# Altium PCB NIR-Spec-Analog.PcbDoc
Units mm, origin at the board's own origin, x right, y up, seen from the top; angles counter-clockwise.
Board outline 22.5 x 15 mm, 2 copper layers (Component Side, Bottom Layer), stack 1.595 mm thick; 29 components, 17 nets, 66 pads, 13 vias.
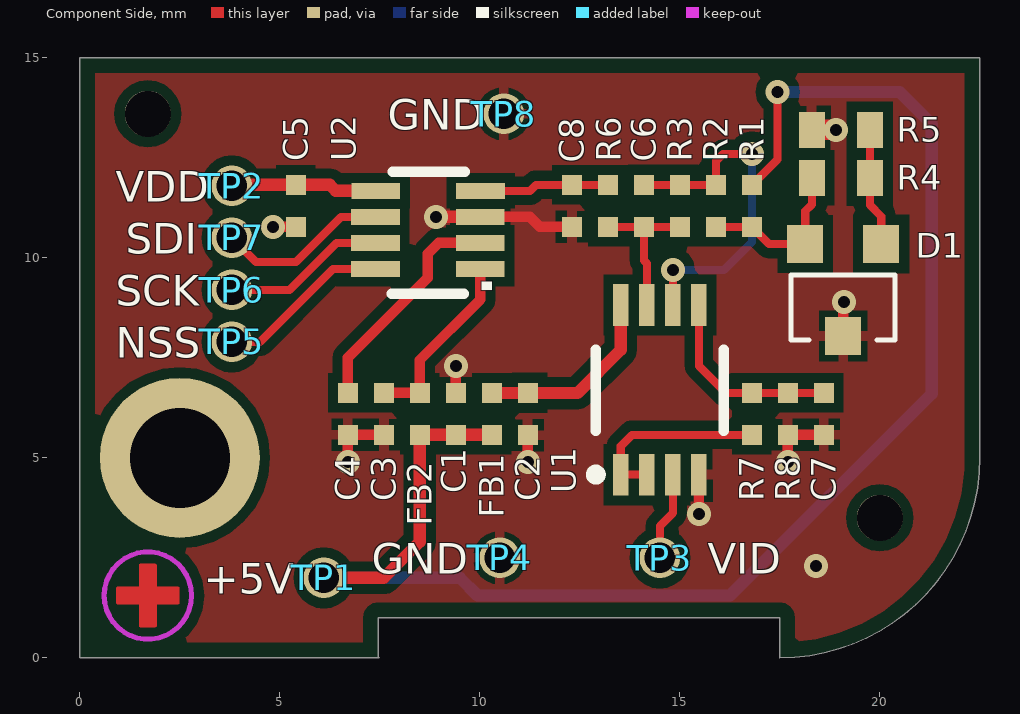
[diagram p0: Component Side view]
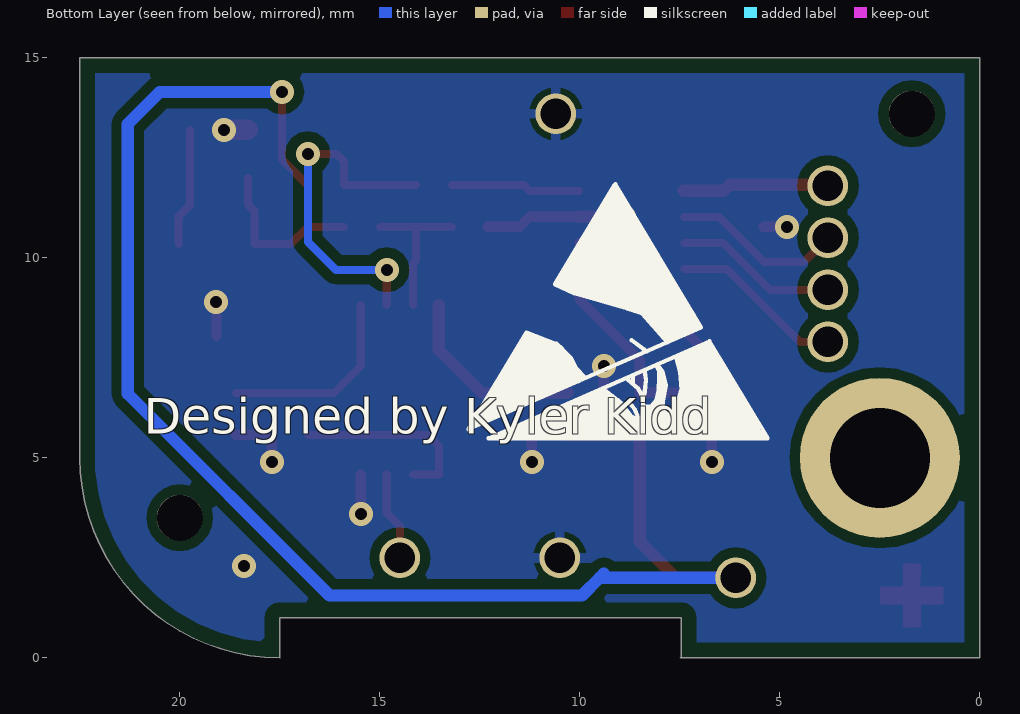
[diagram p1: Bottom Layer view, seen from below]
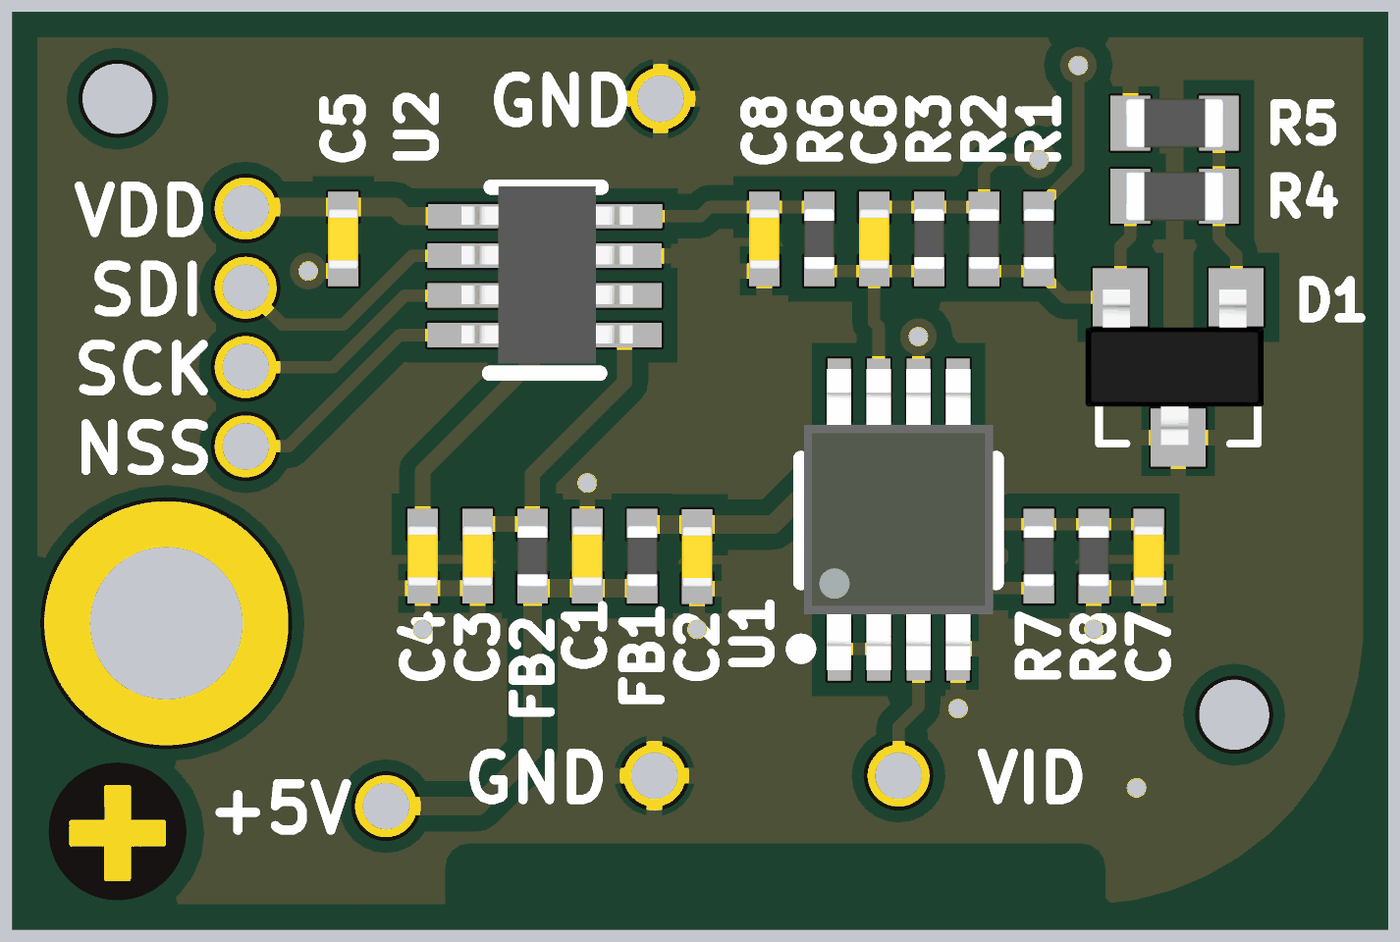
[diagram p2: 3D render of the assembled board from above, using the file's embedded part models]

## Layer stack, top to bottom
Top Solder: solder mask 0.0102, Solder Resist, Dk 3.5
Component Side: signal copper 0.0356
Dielectric 1: core 1.524, FR-4, Dk 4.2
Bottom Layer: signal copper 0.0356
Solder Side: solder mask 0.0102, Solder Resist, Dk 3.5

## Board outline
0,0 0,15 22.5,15 22.5,5 cw(c17.5,5) 17.5,0 17.5,1 7.462,1 7.462,0 7.484,0

## Design rules (kind name [scope] priority, off if disabled: settings)
BoardOutlineClearance [All] p1: gap=0.381 ignorepadtopadclearanceinfootprint=FALSE
Clearance "Clearance Polygons" [InPolygon] p1: gap=0.254 ignorepadtopadclearanceinfootprint=FALSE except(0: Arc-Hole Track-Hole SMDPad-Hole THPad-Hole Via-Hole Fill-Hole Poly-Hole Region-Hole Text-Hole)
Clearance [All] p2: gap=0.127 ignorepadtopadclearanceinfootprint=FALSE except(0: Arc-Hole Track-Hole SMDPad-Hole THPad-Hole Via-Hole Fill-Hole Poly-Hole Region-Hole Text-Hole)
ComponentClearance "HM-TRP & UFL" [InComponent('X1') vs InComponent('U1')] p1: gap=0 collisioncheckmode=3 verticalgap=0 showdistances=FALSE
ComponentClearance [All] p2: gap=0.025 collisioncheckmode=3 verticalgap=0.025 showdistances=FALSE
DiffPairsRouting [All] p1: maxlimit=10 minlimit=0.127 mostfreqgap=0.203 toplayer_minwidth=0.127 toplayer_maxwidth=0.381 toplayer_prefwidth=0.203 bottomlayer_minwidth=0.127 bottomlayer_maxwidth=0.381 bottomlayer_prefwidth=0.203 maxuncoupledlength=12.7
HoleSize [All] p1: absolutevalues=TRUE maxlimit=6.731 minlimit=0.254 maxpercent=80.000 minpercent=20.000
HoleToHoleClearance [All] p1: gap=0.254 allowstackedmicrovias=FALSE
MinimumAnnularRing [All] p1: minimumring=0.102
MinimumSolderMaskSliver [All] p1: minsoldermaskwidth=0
PlaneClearance [All] p1: clearance=0.254
PlaneConnect [All] p1: planeconnectstyle=Relief reliefexpansion=0.102 reliefentries=4 reliefconductorwidth=0.152 reliefairgap=0.152
PolygonConnect "Via connect style" [isVia] p1: connectstyle=Direct reliefconductorwidth=0.254 reliefentries=4 polygonreliefangle="90 Angle" airgapwidth=0.254
PolygonConnect [All] p2: connectstyle=Relief reliefconductorwidth=0.254 reliefentries=4 polygonreliefangle="90 Angle" airgapwidth=0.152
RoutingCorners [All] p1: cornerstyle=45-Degree minsetback=1.25 maxsetback=1.25
RoutingVias [All] p1: holewidth=0.305 width=0.559 viastyle="Through Hole" minholewidth=0.254 minwidth=0.457 maxholewidth=2.54 maxwidth=2.896
SilkToSilkClearance [All] p1: silktosilkclearance=0
SilkToSolderMaskClearance [IsPad] p1: minsilkscreentomaskgap=0.025 clearancetoexposedcopper=TRUE
SolderMaskExpansion [All] p1: expansion=0.064
Width GND [InNet('GND')] p1: maxlimit=0.762 minlimit=0.254 preferedwidth=0.508
Width Power [InNetClass('Power')] p2: maxlimit=1.016 minlimit=0.508 preferedwidth=0.762
Width 3V3 [InNetClass('3V3')] p3: maxlimit=0.762 minlimit=0.254 preferedwidth=0.508
Width [All] p4: maxlimit=10.16 minlimit=0.152 preferedwidth=0.203
20 further rules are at their usual default settings.

## Classes and differential pairs
component class "Test Points": TP1

## Components (designator, comment, footprint, x,y, rotation, side; value= is the part's Value field where it differs from the comment)
C1 "4.7uF" 0402 9.4,6.1 r270 top
C2 "0.1uF" 0402 11.2,6.092 r90 top
C3 "4.7uF" 0402 7.6,6.1 r90 top
C4 "4.7uF" 0402 6.7,6.1 r90 top
C5 "4.7uF" 0402 5.4,11.3 r90 top
C6 "22pF" 0402 14.1,11.3 r90 top
C7 "22pF" 0402 18.6,6.1 r270 top
C8 "470pF" 0402 12.3,11.3 r90 top
D1 "TLV431AQFTA" SOT-23-3 20.8,11 r180 top
FB1 "Ferrite_Bead" 0402 10.3,6.1 r90 top
FB2 "Ferrite_Bead" 0402 8.5,6.1 r90 top
R1 "10k" 0402 16.8,11.3 r270 top
R2 "1.0k" 0402 15.9,11.3 r90 top
R3 "1.2k" 0402 15,11.3 r270 top
R4 "0" 0603 19.025,12 r0 top
R5 "DNP" 0603 19.025,13.2 r180 top
R6 "51" 0402 13.2,11.3 r90 top
R7 "1.0k" 0402 16.8,6.1 r90 top
R8 "1.2k" 0402 17.7,6.1 r90 top
TP1 "TEST POINT" "30x40 TP"#1 6.1,2 r90 top
TP2 "TEST POINT" "30x40 TP"#2 4.3,11.8 r90 top
TP3 "TEST POINT" "30x40 TP"#1 14.5,2.5 r90 top
TP4 "TEST POINT" "30x40 TP"#1 10.5,2.5 r90 top
TP5 "TEST POINT" "30x40 TP"#3 3.8,7.8 r90 top
TP6 "TEST POINT" "30x40 TP"#1 3.8,9.2 r90 top
TP7 "TEST POINT" "30x40 TP"#1 3.8,10.5 r90 top
TP8 "TEST POINT" "30x40 TP"#4 10.6,13.581 r90 top
U1 "AD8072" MSOP-8 14.5,6.7 r0 top
U2 "LTC2312-12" TSOT-23-8 8.7,10.7 r90 top

## Footprints (in the part's own frame and the unit in brackets; to place one, negate y for a bottom-side part, rotate by r counter-clockwise, add the part's x,y. Pads: shape width x height; smd on the part's side, far side on the other; paste and mask are expansions set on the pad)
"30x40 TP"#1 [mil]
  round 40 hole 30: 1(0,0)
"30x40 TP"#2 [mil]
  round 40 hole 30: 1(0,19.69)
"30x40 TP"#3 [mil]
  round 40 hole 30: 1(3.94,0)
"30x40 TP"#4 [mil]
  round 40 hole 30: 1(0.75,0)
0402 [mm] "Chip Capacitor; Body 1.0 x 0.5 mm (LxW typ)"
  rect 0.5x0.5 smd mask+0.038: 1(-0.525,0) 2(0.525,0)
  body extent -0.5,-0.25 0.5,0.25, height 0.6
0603 [mm] "Chip Resistor; Body 1.6 x 0.9 mm (LxW typ)"
  rect 0.65x0.9 smd mask+0.038: 1(-0.725,0) 2(0.725,0)
  body extent -0.8,-0.4 0.8,0.4, height 0.5
MSOP-8 [mm]
  rect 0.38x1.04 smd mask+0.038: 1(-0.975,-2.12) 2(-0.325,-2.12) 3(0.325,-2.12) 4(0.975,-2.12) 5(0.975,2.12) 6(0.325,2.12) 7(-0.325,2.12) 8(-0.975,2.12)
  silkscreen extent -1.72,-2.24 1.6,1, body extent -1.55,-2.47 1.55,2.47, height 1.09
SOT-23-3 [mm]
  rect 0.9x0.95 smd mask+0.038: 1(0.766,0.655) 2(2.666,0.655) 3(1.716,2.955)
  silkscreen extent 0.42,1.43 3.02,3.06, body extent 0.31,0.53 3.24,3.07, height 0.98
TSOT-23-8 [mm] "8-LEAD PLASTIC TSOT-23"
  rect 0.4x1.22 smd mask+0.038: 1(-0.975,-1.31) 2(-0.325,-1.31) 3(0.325,-1.31) 4(0.975,-1.32) 5(0.975,1.3) 6(0.325,1.31) 7(-0.325,1.31) 8(-0.975,1.31)
  silkscreen extent -1.6,-0.93 1.45,0.9, body extent -1.44,-1.44 1.46,1.36, height 1

## Part data
C1 C3 C4 C5: library part CAP, "CAP CER 10UF 10V X6S 0603", Manufacturer="Murata Electronics", Part Number=GRM188C81A106MA73D, Voltage=10V
C2: library part CAP, "CAP CER 0.1UF 50V X7R 0603", Manufacturer=KEMET, Part Number=C0603C104K5RAC3121, Voltage=50V
C6 C7: library part CAP, "CAP CER 22PF NP0 50V 0603", Manufacturer=Vishay, Part Number=VJ0603A220KXAAC, Voltage=50V
C8: library part CAP, "CAP CER 470PF NP0 100V 0603", Manufacturer=Vishay, Part Number=VJ0603A220KXAAC, Voltage=100V
D1: "Shunt Voltage Reference IC Adjustable 1.24V 18 VV ±1% 15 mA SOT-23-3", Manufacturer="Diodes Incorporated", Part Number=TLV431AQFTA
FB1 FB2: "Ferrite Beads 1000 OHM 25%", Manufacturer="Murata Electronics", Part Number=BLM18AG102SH1D, Rated Current="450mA Max", Impedance="1kO at 100MHz"
R1 R4 R5: library part RES, "RESISTOR"
R2 R7: library part RES, Manufacturer="TE Connectivity", Part Number=CPF-A-0603B1K0E
R3 R8: library part RES, "Thin Film Resistors - SMD 0603 249ohms 25ppm 0.5%", Manufacturer=Panasonic, Part Number=ERA-3AED2490V
R6: library part RES, "Thin Film Resistors - SMD .1W 51ohm 1% 0603", Manufacturer=Vishay, Part Number=MCT06030C5109FP500
U1: "IC OPAMP VIDEO DUAL 8MSOP", Manufacturer="Analog Devices Inc.", Part Number=AD8072ARMZ
U2: library part LTC2314xTS8-14#TRMPBF, "IC ADC 12BIT SAR TSOT23-8", Manufacturer="Linear Technology", Part Number=LTC2314xTS8-14#TRMPBF
TP1: ClassName="Test Points"

## Free pads (board coordinates)
  round 1.152 hole 1.152 unplated: TH(1.7,13.6) TH(20,3.5)
  round 4 hole 2.5: ""(2.5,5)

## Via types
v1: diameter 0.6, hole 0.3, Component Side to Bottom Layer, tented both sides, 13 vias

## Nets (pads, with @x,y where several pads share a name; then routed paths per layer and width w, separated by ;. In a path a pad name is that pad's centre, name@x,y a point inside that pad or via, vN(x,y) a via of type N, cw(c..) or ccw(c..) an arc to the next point about the centre after c; other vN are vias at no path point)
+3.3V: C5.2 TP2.1 U2.5 | length 3.7
  Component Side w0.305: TP2.1 3.825,11.825 5.6,11.825 6.25,11.825 6.4,11.675 U2.5
+5.0V: C1.2 FB1.1 FB2.1 R1.1 TP1.1 | length 38.4
  Component Side w0.203: R1.1 16.808,11.825 17.446,12.463 v1(17.446,14.146)
  Component Side w0.305: TP1.1 7.6,2 8.5,2.9 FB2.1 C1.2 FB1.1
  Bottom Layer w0.305: TP1.1 9.5,2 ; 9.4,2.1 9.5,2 ; v1(17.446,14.146) 20.5,14.146 21.3,13.346 21.3,6.6 16.257,1.557 9.943,1.557 9.5,2
D_VID: TP3.1 U1.3 | length 2.2
  Component Side w0.203: TP3.1 14.5,3.3 14.825,3.625 U1.3
GND: C1.1 C2.1 C3.1 C4.1 C5.1 C7.2 C8.1 D1.3 R5.2 R8.1 TP4.1 TP8.1 U1.4 U2.3 | length 11
  Component Side w0.254: v1(4.825,10.775) C5.1 ; v1(6.7,4.9) C4.1 C3.1 ; C1.1 v1(9.4,7.3) ; U2.3 11.25,11.025 11.5,10.775 C8.1 ; v1(11.2,4.9) C2.1 ; v1(15.475,3.6) U1.4 ; v1(17.7,4.9) R8.1 C7.2 ; D1.3 19.084,8.884 v1(19.1,8.9)
  Component Side w0.305: v1(8.9,11.025) U2.3
  Component Side w0.508: R5.2 v1(18.9,13.2)
  other v1: 18.4,2.3
MCU_NSS: TP5.1 U2.8 | length 4.3
  Component Side w0.203: TP5.1 4.5,7.9 6.325,9.725 U2.8
MCU_SCK: TP6.1 U2.7 | length 4.1
  Component Side w0.203: TP6.1 5.24,9.2 6.415,10.375 U2.7
MCU_SDI: TP7.1 U2.6 | length 4.3
  Component Side w0.203: TP7.1 4.4,9.9 5.4,9.9 6.525,11.025 U2.6
NetC2_2: C2.2 FB1.2 U1.8 | length 4.8
  Component Side w0.305: FB1.2 10.308,6.617 C2.2 12.442,6.617 13.525,7.7 U1.8
NetC3_2: C3.2 FB2.2 U2.1 | length 4.6
  Component Side w0.254: C3.2 FB2.2 8.5,7.445 10.01,8.955 U2.1
NetC4_2: C4.2 U2.2 | length 5.7
  Component Side w0.254: C4.2 6.7,7.5 8.7,9.5 8.7,10.1 8.975,10.375 U2.2
NetC6_1: C6.1 R3.2 R6.1 U1.7 | length 3.8
  Component Side w0.203: R6.1 C6.1 ; U1.7 14.175,9.86 14.1,9.935 C6.1 ; R3.2 C6.1
NetC6_2: C6.2 R2.2 R3.1 U1.6 | length 8.7
  Component Side w0.203: C6.2 R3.1 R2.2 15.9,12.419 16.081,12.6 v1(16.8,12.6) ; U1.6 v1(14.825,9.7)
  Bottom Layer w0.203: v1(14.825,9.7) 16.1,9.7 16.8,10.4 v1(16.8,12.6)
NetC7_1: C7.1 R7.2 R8.2 U1.5 | length 4.9
  Component Side w0.203: U1.5 15.475,7.3 16.15,6.625 R7.2 R8.2 C7.1
NetC8_2: C8.2 R6.2 U2.4 | length 3.2
  Component Side w0.203: U2.4 11.25,11.675 11.4,11.825 C8.2 R6.2
NetD1_1: D1.1 R4.2 R5.1 | length 3
  Component Side w0.203: R5.1 R4.2 19.75,11.321 20.034,11.037 D1.1
NetD1_2: D1.2 R1.2 R2.1 R4.1 | length 4.1
  Component Side w0.203: R2.1 R1.2 17.23,10.345 D1.2 18.134,11.171 18.3,11.337 R4.1
NetR7_1: R7.1 U1.1 U1.2 | length 4.8
  Component Side w0.203: U1.2 U1.1 13.525,5.3 13.8,5.575 R7.1

## Polygon pours and split planes (outlines as drawn)
GND on Component Side "GND_L01_P051" (solid, remove dead copper, pour order 51): 0,0 0,15 22.5,15 22.5,5 cw(c17.5,5) 17.5,0 17.5,1 7.462,1 7.462,0 7.484,0
GND on Bottom Layer "GND_L02_P052" (solid, remove dead copper, pour order 52): 0,0 0,15 22.5,15 22.5,5 cw(c17.5,5) 17.5,0 17.5,1 7.462,1 7.462,0 7.484,0

## Keep-outs
Component Side:
  circle w0.127: c1.701,1.557 r1.092

## Other copper
Component Side:
  region: 1.911,2.338 1.919,2.319 1.919,1.775 2.463,1.775 2.482,1.766 2.49,1.747 2.49,1.366 2.482,1.347 2.463,1.339 1.919,1.339 1.919,0.795 1.911,0.775 1.891,0.767 1.51,0.767 1.491,0.775 1.483,0.795 1.483,1.339 0.939,1.339 0.919,1.347 0.911,1.366 0.911,1.747 0.919,1.766 0.939,1.775 1.486,1.775 1.483,2.318 1.483,2.319 1.487,2.328 1.491,2.338 1.5,2.342 1.51,2.346 1.891,2.346

## Silkscreen, mask and mechanical layers (free items; w line width, h text height)
Top Overlay:
  text "GND" at 7.7,13.2 h0.76
  text "VDD" at 0.9,11.4 h0.76
  text "SDI" at 1.154,10.1 h0.76
  text "SCK" at 0.9,8.8 h0.76
  text "NSS" at 0.9,7.5 h0.76
  text "GND" at 7.3,2.1 h0.76
  text "VID" at 15.7,2.1 h0.76
  text "+5V" at 3.1,1.6 h0.76
Bottom Overlay:
  drawing of 234 lines, arcs and shapes, not listed
  text "Designed by Kyler Kidd" at 20.9,5.3 h1.52
Top Solder:
  circle w0.254: c1.701,1.586 r1.001
  rectangle: 0.901,0.786 2.476,1.186
  rectangle: 0.926,2.011 2.476,2.386
  rectangle: 1.276,0.561 2.076,2.611
  rectangle: 0.751,1.161 2.626,2.036
  region: 1.906,2.367 1.914,2.348 1.914,1.804 2.458,1.804 2.478,1.796 2.486,1.776 2.486,1.395 2.478,1.376 2.458,1.368 1.914,1.368 1.914,0.824 1.906,0.804 1.887,0.796 1.506,0.796 1.487,0.804 1.478,0.824 1.478,1.368 0.934,1.368 0.915,1.376 0.907,1.395 0.907,1.776 0.915,1.796 0.934,1.804 1.482,1.804 1.478,2.347 1.478,2.348 1.482,2.357 1.486,2.367 1.487,2.367 1.496,2.371 1.506,2.375 1.887,2.375
  region: 1.911,2.338 1.919,2.319 1.919,1.775 2.463,1.775 2.482,1.766 2.49,1.747 2.49,1.366 2.482,1.347 2.463,1.339 1.919,1.339 1.919,0.795 1.911,0.775 1.891,0.767 1.51,0.767 1.491,0.775 1.483,0.795 1.483,1.339 0.939,1.339 0.919,1.347 0.911,1.366 0.911,1.747 0.919,1.766 0.939,1.775 1.486,1.775 1.483,2.318 1.483,2.319 1.487,2.328 1.491,2.338 1.5,2.342 1.51,2.346 1.891,2.346
Mechanical 1:
  lines w0.254: 0,0 7.462,0 7.462,1 17.5,1 17.5,0 ccw(c17.5,5) 22.5,5 22.5,15 0,15 0,0
ASSY_TOP:
  drawing of 322 lines, arcs and shapes, not listed
  text "SH" at 349.503,298.663 h2.54
  text "DWG NO" at 274.351,298.248 h2.54
  text ".DocNumber" at 291.002,295.408 h3.05
  text "2" at -247.993,294.92 h5.08
  text "4" at -31.92,294.92 h5.08
  text "8" at 392.438,294.92 h5.08
  text "1" at -355.721,294.76 h5.08
  text "3" at -139.999,294.76 h5.08
  text "5" at 76.079,294.76 h5.08
  text "6" at 184.026,294.76 h5.08
  text "1" at 354.502,294.392 h3.05
  text "REVISION HISTORY" at 300.654,288.013 h2.54
  text "REV" at 276.27,281.946 h2.54
  text "DESCRIPTION" at 321.99,281.946 h2.54
  text "DATE" at 380.41,281.946 h2.54
  text "APPROVED" at 410.89,281.946 h2.54
  text ".Hist1Rev" at 277.175,277.345 h2.54
  text ".Hist1Desc" at 288.97,276.866 h2.54
  text ".Hist1Date" at 372.79,276.866 h2.54
  text ".Hist1Appr" at 403.27,276.866 h2.54
  text "NOTES" at -368.89,275.59 h10.16
  text ".Hist2Rev" at 277.175,271.732 h2.54
  text ".Hist2Desc" at 288.97,271.252 h2.54
  text ".Hist2Date" at 372.79,271.252 h2.54
  text ".Hist2Appr" at 403.27,271.252 h2.54
  text "1. DIMENSIONING AND TOLERANCING PER ASME Y14.5M-1994" at -368.89,267.97 h5.08
  text ".Hist3Rev" at 277.175,266.144 h2.54
  text ".Hist3Desc" at 288.97,265.664 h2.54
  text ".Hist3Date" at 372.79,265.664 h2.54
  text ".Hist3Appr" at 403.27,265.664 h2.54
  text "2. INTERPRET PER ASME Y14.100M" at -368.89,260.35 h5.08
  text "3. ASSEMBLE PER IPC-A-610, CLASS 2" at -368.89,252.73 h5.08
  text "4. SOLDER PER J-STD-001, CLASS 2. USE LEAD-FREE SOLDER" at -368.89,245.11 h5.08
  text "5. ALL PARTS SHOWN MAY NOT BE INSTALLED. FOR SCHEMATIC, SEE SEPARATE PARTS LIST" at -368.89,237.49 h5.08
  text "A" at -397.79,231.255 h5.08
  text "A" at 440.497,231.255 h5.08
  text "6. DATA INCLUDED IN PARENTHESIS IS FOR REFERENCE ONLY" at -368.89,229.87 h5.08
  text "7. FOR COMPONENTS WITH REFERENCE DESIGNATORS, REFER TO PARTS LIST BY REFERENCE DESIGNATION" at -368.89,222.25 h5.08
  text "8. ELECTROSTATIC DISCHARGE CONTROL PROGRAM FOR PROTECTION OF ELECTRICAL AND ELECTRONIC" at -368.89,214.63 h5.08
  text "PARTS, ASSEMBLIES, AND EQUIPMENT SHALL BE PER IPC-610 OR BETTER" at -368.89,207.01 h5.08
  text "9. THE PCB MATERIAL MANUFACTURER'S RECOMMENDATIONS FOR PCB MATERIAL STORAGE, PRE-PROCESS" at -368.89,199.39 h5.08
  text "BAKEOUT, PROCESSING AND MATERIAL HANDLING SHALL BE STRICTLY FOLLOWED DURING ALL ASSEMBLY" at -363.81,191.77 h5.08
  text "PROCESSES. DEVIATION FROM THESE STANDARDS REQUIRES WRITTEN AUTHORIZATION FROM OCEAN OPTICS, INC" at -363.81,184.15 h5.08
  text "10. MARK LAST 3 DIGITS OF DRAWING NUMBER (-XXX) IN A CLEAR AND LEGIBLE MANNER USING POLYIMIDE BRADY LABEL" at -371.43,176.53 h5.08
  text "11. MARK DOCUMENT REVISION IN A CLEAR AND LEGIBLE MANNER USING POLYIMIDE BRADY LABEL" at -371.43,168.91 h5.08
  text "12. ALL PROCESSES AND PROCEDURES SHALL BE ROHS COMPLIANT" at -371.43,161.29 h5.08
  text "13. COMPLETED CIRCUIT CARD ASSEMBLIES SHALL BE PACKAGED INDIVIDUALLY" at -371.43,153.67 h5.08
  text "IN STATIC SHIELDING PACKAGING IN ACCORDANCE WITH ANSI/ESD-S-20.20" at -363.81,146.05 h5.08
  text "B" at -397.84,91.395 h5.08
  text "B" at 440.447,91.395 h5.08
  text "C" at -397.255,-48.078 h5.08
  text "C" at 441.031,-48.078 h5.08
  text "Dimensions in mm" at 326.5,-77 h6.35
  text "Scale  3:1" at 221.5,-97 h12.7
  text "SEE SEPARATE PARTS LIST." at 171.876,-166.872 h10.16
  text "DFTG" at 212.77,-175.791 h2.54
  text ".NameDftg" at 225.978,-175.791 h2.54
  text ".DateDftg" at 265.602,-175.791 h2.54
  text "UNLESS OTHERWISE SPECIFIED," at 157.906,-180.109 h2.03
  text "MATERIAL:" at 94.736,-180.334 h2.54
  text "ENG" at 212.77,-182.395 h2.54
  text ".NameEng" at 225.978,-182.395 h2.54
  text ".DateEng" at 265.602,-182.395 h2.54
  text "INCHES" at 193.974,-183.636 h2.03
  text "DIMENSIONS ARE IN" at 157.906,-183.665 h2.03
  text "D" at -397.508,-187.777 h5.08
  text "D" at 440.779,-187.777 h5.08
  text "MECH" at 212.77,-187.983 h2.54
  text "*" at 225.978,-188.491 h2.54
  text "*" at 265.602,-188.491 h2.54
  text "TITLE:" at 304.58,-190.523 h2.54
  text "TOLERANCES:" at 157.906,-191.539 h2.54
  text "SEE NOTES" at 96.565,-193.542 h2.54
  text "MFG" at 212.77,-194.587 h2.54
  text "*" at 225.978,-194.587 h2.54
  text "*" at 265.602,-195.095 h2.54
  text ".X +/- 0.1" at 158.922,-196.111 h2.54
  text ".XX +/- 0.01" at 158.922,-199.159 h2.54
  text ".TitleCCA" at 311.195,-199.511 h5.59
  text ".XXX +/- 0.001" at 158.922,-202.207 h2.54
  text ".Title0" at 315.5,-209 h5.59
  text "THIRD ANGLE PROJECTION" at 96.184,-213.761 h2.54
  text "ALL SHEETS ARE THE" at 162.478,-217.859 h2.54
  text ".Title1" at 308.02,-218.44 h5.59
  text "SAME REVISION STATUS" at 160.129,-222.431 h2.54
  text "SIZE" at 304.718,-225.575 h2.54
  text "DRAWING NUMBER" at 314.37,-225.575 h2.54
  text "REV" at 421.442,-227.125 h3.05
  text "D" at 304.76,-233.416 h5.08
  text ".DocNumber" at 314.37,-233.674 h6.6
  text ".Rev" at 421.05,-233.674 h5.08
  text "1" at 405.81,-238.754 h2.54
  text "2" at 421.05,-238.754 h2.54
  text "1:1" at 318.18,-239.008 h2.54
  text "SCALE" at 304.154,-239.183 h2.54
  text "SHEET   OF" at 390.061,-239.398 h2.54
  text "8" at 397.936,-249.93 h5.08
  text "1" at -355.555,-250.184 h5.08
  text "2" at -247.993,-251.178 h5.08
  text "4" at -31.92,-251.178 h5.08
  text "3" at -139.999,-251.338 h5.08
  text "5" at 76.079,-251.338 h5.08
  text "6" at 184.026,-251.338 h5.08
  text "7" at 292,-251.338 h5.08
Drill Drawing:
  lines w0.381: -328.718,-181.604 -328.718,-173.984 ; -310.993,-181.604 -310.993,-173.984 ; -276.815,-181.604 -276.815,-173.984 ; -263.966,-181.604 -263.966,-173.984 ; -342.71,-181.604 -244.184,-181.604 -244.184,-173.984 -342.71,-173.984 -342.71,-181.604 ; -342.71,-177.794 -244.184,-177.794 -342.71,-177.794
  text "Symbol" at -340.424,-176.651 h1.83
  text "Hit Count" at -327.575,-176.651 h1.83
  text "Finished Hole Size" at -309.85,-176.651 h1.83
  text "Plated" at -275.672,-176.651 h1.83
  text "Hole Type" at -262.823,-176.651 h1.83
ASSY_BOT:
  lines w0.198: -378.912,281.438 -219.197,281.438 ; -378.912,286.518 -219.197,286.518 ; -345.816,281.565 -345.811,292.103 ; -313.177,281.057 -313.177,292.106 ; -231.897,275.723 -231.897,292.106 ; -404.45,-253.797 -404.45,304.806 ; -404.45,-253.797 458.983,-253.797 ; -404.45,-253.797 458.983,-253.797 ; -404.45,-253.797 -404.45,304.806 ; -404.45,304.806 458.983,304.806 ; -404.45,304.806 458.983,304.806 ; 458.983,-253.797 458.983,304.806 ; 458.983,-253.797 458.983,304.806
  lines w0.599: -398.282,-107.947 -379.232,-107.947 ; -398.282,165.102 -379.232,165.102 ; -379.232,292.101 -379.232,-241.297 ; -379.232,-222.247 -249.184,-222.247 ; -364.221,-234.947 -364.221,-222.247 ; -334.782,-241.297 -334.782,-234.947 ; -296.682,-250.822 -296.682,-241.297 ; -249.185,-241.167 -249.185,-222.628 ; -219.319,275.088 -219.319,292.103 ; -188.733,-250.822 -188.733,-241.297 ; -188.733,292.101 -188.733,301.626 ; -80.783,-250.822 -80.783,-241.297 ; -80.783,292.101 -80.783,301.626 ; 135.117,-250.822 135.117,-241.297 ; 135.117,292.101 135.117,301.626 ; 243.067,-250.822 243.067,-241.297 ; 351.016,-250.822 351.016,-241.297 ; 351.016,292.101 351.016,301.626 ; 433.566,165.102 452.616,165.102 ; 433.566,292.103 -379.245,292.103 ; 434.201,-107.947 453.251,-107.947 ; -379.245,292.103 -379.245,271.626 -379.245,292.103 ; -379.232,-241.297 433.566,-241.297 ; -379.232,-241.297 433.566,-241.297 ; -379.232,-241.297 433.566,-241.297 ; -379.232,-241.297 433.566,-241.297 ; -379.232,-234.947 -249.184,-234.947 ; -379.232,-234.947 -249.184,-234.947 ; -379.232,-234.947 -249.184,-234.947 ; -379.232,-234.947 -249.184,-234.947 ; -306.842,292.101 -306.842,301.753 ; -306.842,292.101 -306.842,301.753 ; -306.842,292.101 -306.842,301.753 ; -306.842,292.101 -306.842,301.753 ; -306.842,292.101 -306.842,301.753 ; -306.842,292.101 -306.842,301.753 ; -306.842,292.101 -306.842,301.753 ; -306.842,292.101 -306.842,301.753 ; -306.842,301.753 -219.299,301.753 ; -306.842,301.753 -224.292,301.753 -306.842,301.753 ; -306.842,301.753 -219.299,301.753 ; -294.142,292.101 -294.142,301.753 ; -294.142,292.101 -294.142,301.753 ; -294.142,292.101 -294.142,301.753 ; -294.142,292.101 -294.142,301.753 ; -219.299,301.753 -219.299,292.101 -219.299,301.753 ; 243.067,292.101 243.067,301.626 ; 243.067,292.101 243.067,301.626 ; 243.067,292.101 243.067,301.626 ; 243.067,292.101 243.067,301.626 ; 433.566,-241.297 433.566,284.278 433.566,-241.297 ; 433.566,-241.297 433.566,292.101 ; 433.566,-241.297 433.566,292.101 ; 433.566,-241.297 433.566,292.101 ; -389.392,24.64 -389.392,26.164 -384.312,26.164 -384.312,27.942 -379.232,25.402 -384.312,22.862 -384.312,24.64 -389.392,24.64 ; 24.627,-246.377 27.167,-241.297 29.707,-246.377 27.929,-246.377 27.929,-251.457 26.405,-251.457 26.405,-246.377 24.627,-246.377 ; 24.627,297.181 27.167,292.101 29.707,297.181 27.929,297.181 27.929,302.26 26.405,302.26 26.405,297.181 24.627,297.181 ; 433.566,25.402 438.646,22.862 438.646,24.64 443.726,24.64 443.726,26.164 438.646,26.164 438.646,27.942 433.566,25.402
  text "SH" at -294.97,298.663 h2.54
  text "DWG NO" at -219.818,298.248 h2.54
  text ".DocNumber" at -236.469,295.408 h3.05
  text "8" at -337.905,294.92 h5.08
  text "4" at 86.453,294.92 h5.08
  text "2" at 302.526,294.92 h5.08
  text "6" at -129.493,294.76 h5.08
  text "5" at -21.546,294.76 h5.08
  text "3" at 194.532,294.76 h5.08
  text "3" at 194.532,294.76 h5.08
  text "1" at 410.254,294.76 h5.08
  text "1" at -299.969,294.392 h3.05
  text "REVISION HISTORY" at -246.121,288.013 h2.54
  text "APPROVED" at -356.357,281.946 h2.54
  text "DATE" at -325.877,281.946 h2.54
  text "DESCRIPTION" at -267.457,281.946 h2.54
  text "REV" at -221.737,281.946 h2.54
  text "SEE SHEET 1" at -234.437,276.866 h2.54
  text "A" at -385.964,231.255 h5.08
  text "A" at 452.323,231.255 h5.08
  text "B" at -385.914,91.395 h5.08
  text "B" at 452.373,91.395 h5.08
  text "C" at -386.498,-48.078 h5.08
  text "C" at 451.788,-48.078 h5.08
  text "Scale  3:1" at 269.5,-97 h12.7
  text "D" at -386.246,-187.777 h5.08
  text "D" at 452.041,-187.777 h5.08
  text "REV" at -366.909,-227.125 h3.05
  text ".DocNumber" at -255.392,-232.404 h5.08
  text ".Rev" at -366.517,-233.674 h5.08
  text "2" at -366.517,-238.754 h2.54
  text "SHEET 2 OF" at -335.528,-239.398 h2.54
  text "8" at -343.403,-249.93 h5.08
  text "1" at 410.255,-250.184 h5.08
  text "4" at 86.453,-251.178 h5.08
  text "2" at 302.526,-251.178 h5.08
  text "7" at -237.467,-251.338 h5.08
  text "6" at -129.493,-251.338 h5.08
  text "5" at -21.546,-251.338 h5.08
  text "3" at 194.532,-251.338 h5.08
PCB_SHEET1:
  drawing of 741 lines, arcs and shapes, not listed
  text "SH" at 349.503,298.657 h2.54
  text "DWG NO" at 274.351,298.243 h2.54
  text "DWG NO" at 274.351,298.248 h2.54
  text ".DocNumberPCB" at 291.002,295.402 h3.05
  text "2" at -247.993,294.914 h5.08
  text "4" at -31.92,294.914 h5.08
  text "8" at 392.438,294.914 h5.08
  text "1" at -355.721,294.754 h5.08
  text "3" at -139.999,294.754 h5.08
  text "5" at 76.079,294.754 h5.08
  text "6" at 184.026,294.754 h5.08
  text "1" at 354.502,294.386 h3.05
  text "REVISION HISTORY" at 300.654,288.008 h2.54
  text "REV" at 276.27,281.94 h2.54
  text "DESCRIPTION" at 321.99,281.94 h2.54
  text "DATE" at 380.41,281.94 h2.54
  text "APPROVED" at 410.89,281.94 h2.54
  text "11" at -20.91,278.13 h5.08
  text "5" at -11.258,278.13 h5.08
  text ".Hist1Rev" at 277.175,277.34 h2.54
  text "LAYER STACKUP:" at -1.098,276.86 h10.16
  text ".Hist1Desc" at 288.97,276.86 h2.54
  text ".Hist1Date" at 372.79,276.86 h2.54
  text ".Hist1Appr" at 403.27,276.86 h2.54
  text "NOTES" at -368.89,275.59 h10.16
  text ".Hist2Rev" at 277.175,271.777 h2.54
  text ".Hist2Desc" at 288.97,271.297 h2.54
  text ".Hist2Date" at 372.79,271.297 h2.54
  text ".Hist2Appr" at 403.27,271.297 h2.54
  text "1. UNLESS OTHERWISE SPECIFIED, DIMENSIONS, TOLERANCES, AND SURFACE TEXTURE APPLY" at -368.89,267.97 h5.08
  text ".Hist3Rev" at 277.175,266.164 h2.54
  text ".Hist3Desc" at 288.97,265.684 h2.54
  text ".Hist3Date" at 372.79,265.684 h2.54
  text ".Hist3Appr" at 403.27,265.684 h2.54
  text "AFTER PLATING OR CHEMICAL FILM TREATMENTS, AND PRIOR TO ORGANIC COATINGS." at -363.81,260.35 h5.08
  text "2. DIMENSIONING AND TOLERANCING PER ASME Y14.5M-1994" at -368.89,252.73 h5.08
  text "3. PARTS SHALL BE FREE OF BURRS AND SHARP EDGES. BREAK SHARP EDGES .005\" MAX" at -368.89,245.11 h5.08
  text "Layer" at -21.642,244.221 h0.76
  text "Name" at -16.283,244.221 h0.76
  text "Material" at -4.196,244.221 h0.76
  text "Thickness" at 6.875,244.221 h0.76
  text "Constant" at 15.281,244.221 h0.76
  text "Board Layer Stack" at 22.67,244.221 h0.76
  text "1" at -21.642,242.697 h0.76
  text "Top Overlay" at -16.283,242.697 h0.76
  text "2" at -21.642,241.173 h0.76
  text "Top Solder" at -16.283,241.173 h0.76
  text "Solder Resist" at -4.196,241.173 h0.76
  text "0.40mil" at 6.875,241.173 h0.76
  text "3.5" at 15.281,241.173 h0.76
  text "3" at -21.642,239.649 h0.76
  text "Component Side" at -16.283,239.649 h0.76
  text "Copper" at -4.196,239.649 h0.76
  text "1.40mil" at 6.875,239.649 h0.76
  text "4" at -21.642,238.125 h0.76
  text "Dielectric 1" at -16.283,238.125 h0.76
  text "FR-4" at -4.196,238.125 h0.76
  text "60.00mil" at 6.875,238.125 h0.76
  text "4.2" at 15.281,238.125 h0.76
  text "4. UNLESS OTHERWISE SPECIFIED, BOARD SHALL MEET THE REQUIREMENTS OF IPC-6011" at -368.89,237.49 h5.08
  text "5" at -21.642,236.601 h0.76
  text "Bottom Layer" at -16.283,236.601 h0.76
  text "Copper" at -4.196,236.601 h0.76
  text "1.40mil" at 6.875,236.601 h0.76
  text "6" at -21.642,235.077 h0.76
  text "Solder Side" at -16.283,235.077 h0.76
  text "Solder Resist" at -4.196,235.077 h0.76
  text "0.40mil" at 6.875,235.077 h0.76
  text "3.5" at 15.281,235.077 h0.76
  text "7" at -21.642,233.553 h0.76
  text "Bottom Overlay" at -16.283,233.553 h0.76
  text "A" at -397.79,231.249 h5.08
  text "A" at 440.497,231.249 h5.08
  text "CLASS 2, AND IPC-6012, TYPE 2." at -363.81,229.87 h5.08
  text "5. MATERIAL: POLYCLAD 370HR OR EQUIVALENT IAW IPC-4101. THIS BOARD IS INTENDED FOR LEAD-FREE" at -368.89,222.25 h5.08
  text "ASSEMBLY (RoHS COMPLIANT). FLAMMABILITY RATING OF 94V-0 OR BETTER REQUIRED. BOARD MUST BE UL" at -363.81,214.63 h5.08
  text "RECOGNIZED AND VENDOR SHALL AFFIX UL LISTING DESIGNATION ON PRINTED CIRCUIT BOARD." at -363.81,207.01 h5.08
  text "A. BASE LAMINATE: WOVEN GLASS BASED EPOXY RESIN." at -363.81,199.39 h5.08
  text "SEE STACK DETAIL FOR COPPER WEIGHT, SUBSTRATES, AND FINISHED BOARD THICKNESS" at -357.46,191.77 h5.08
  text "B. BONDING AGENT: PREIMPREGNATED B-STAGE EPOXY CLOTH (GF)" at -363.81,184.15 h5.08
  text "C. FINISH TO BE DONE USING IMMERSION GOLD (ENIG) 3-6 MICROINCHES OVER NICKEL 100 MICROINCHES MIN." at -363.81,176.53 h5.08
  text "FULL BODY IMMERSION GOLD ACCEPTED." at -357.46,168.91 h5.08
  text "OVERALL HEIGHT = 0.xxx +/- 10%" at -28.911,163.074 h5.08
  text "D. SILKSCREEN TO BE DONE USING NON-CONDUCTIVE WHITE EPOXY INK. VENDOR MAY VIA CAP OR PLUG VIAS" at -363.81,161.29 h5.08
  text "TOP AND BOTTOM LAYER COPPER THICKNESS SPECIFIED AFTER PLATING" at -28.911,156.083 h5.08
  text "BEFORE FINAL SOLDERMASK TO AVOID TRIMMING OF SILKSCREEN. SILKSCREEN INK NOT ALLOWED ON ANY" at -357.46,153.67 h5.08
  text "EXPOSED ETCH. VENDOR TO DETERMINE BEST PROCESS TO ENSURE THIS." at -357.46,146.05 h5.08
  text "E. SOLDERMASK OVER BARE COPPER FOLLOWED BY PLATING PER LAYER STACKUP." at -363.81,138.43 h5.08
  text "SOLDERMASK IS TO BE FREE OF SHADED AREAS, AND IS TO BE BLACK, TYPE B1, CLASS 2, IAW IPC-SM-840." at -357.46,130.81 h5.08
  text "6. FINAL TRACES WIDTHS AND LAND SIZES REPRESENTED BY ARTWORK. THE FINAL" at -368.89,123.19 h5.08
  text "CONDUCTOR WIDTH SHALL BE +/- 0.001\" OF THE ORIGINAL ARTWORK TRACE. THE PCB" at -363.81,115.57 h5.08
  text "MANUFACTURER IS DIRECTED TO INFLATE FEATURES IN THE SUPPLIED GERBER FILES, AS" at -363.81,107.95 h5.08
  text "NECESSARY, TO COMPENSATE FOR THE ETCHBACK IN THE PCB MANUFACTURER'S PROCESS." at -363.81,100.33 h5.08
  text "7. MANUFACTURER TO INSERT COMPANY LOGO AND DATE CODE IN BOTTOM SILKSCREEN," at -369.525,92.71 h5.08
  text "B" at -397.84,91.39 h5.08
  text "B" at 440.447,91.39 h5.08
  text "USING PREFERRED METHOD (NON-CONDUCTIVE)." at -363.81,85.09 h5.08
  text "8. UNLESS OTHERWISE SPECIFIED:" at -369.525,77.47 h5.08
  text "A. ALL HOLES TO BE CONCENTRIC WITH PAD CENTER WITHIN +/- 0.005\"." at -363.81,69.85 h5.08
  text "B. ALL HOLE DIAMETERS TO BE WITHIN +/- 0.003\" OF SPECIFIED DIAMETER." at -363.81,62.23 h5.08
  text "C. PLATED THROUGH HOLE DIAMETERS SPECIFIED AFTER PLATING." at -363.81,54.61 h5.08
  text "9. FABRICATE AND TEST BOARD, TYPE 2, CLASS 1, LEVEL A, PER IPC-D-275. VENDOR MUST USE IPC D 356 NETLIST" at -368.89,46.99 h5.08
  text "PROVIDED PRIOR TO BOARD FABRICATION AND REPORT ANY DISCREPANCIES WHEN COMPARED WITH THE GERBERS." at -363.81,39.37 h5.08
  text "10. INFORMATION IN PARENTHESIS IS FOR REFERENCE ONLY." at -368.89,31.75 h5.08
  text "11. MAINTAIN CONTROLLED IMPEDANCES:" at -369.187,23.406 h5.08
  text "A. HS-USB - Bottom Layer differential pair; 90 ohms differential impedance; Length differences < 25 mils" at -364.272,16.476 h5.08
  text "Trace Width = 15.0mils; Inside Gap = 6.3mils. (Microstrip Differential Pair)" at -358.101,9.175 h5.08
  text "12. VENDOR IS ALLOWED TO DO THE FOLLOWING:" at -369.868,1.034 h5.08
  text "A. FOLLOW BOARD OUTLINE FOR SIZE OF BOARD." at -364.272,-6.497 h5.08
  text "B. REMOVE INTERNAL NON FUNCTIONAL PADS." at -364.272,-14.028 h5.08
  text "C. ADD TEAR DROPPING" at -364.272,-21.559 h5.08
  text "D. REMOVE SOLDERMASK SLIVERS LESS THAN 0.003 TO ENHANCE PRODUCABILITY." at -364.272,-29.09 h5.08
  text "C" at -397.255,-48.084 h5.08
  text "C" at 441.031,-48.084 h5.08
  text "Scale  3:1" at 221.5,-97 h12.7
  text "DFTG" at 212.77,-175.796 h2.54
  text ".NameDftg" at 225.978,-175.796 h2.54
  text ".DateDftg" at 265.602,-175.796 h2.54
  text "UNLESS OTHERWISE SPECIFIED," at 157.906,-180.114 h2.03
  text "MATERIAL:" at 94.736,-180.34 h2.54
  text "ENG" at 212.77,-182.4 h2.54
  text ".NameEng" at 225.978,-182.4 h2.54
  text ".DateEng" at 265.602,-182.4 h2.54
  text "INCHES" at 193.974,-183.642 h2.03
  text "DIMENSIONS ARE IN" at 157.906,-183.67 h2.03
  text "D" at -397.508,-187.783 h5.08
  text "D" at 440.779,-187.783 h5.08
  text "MECH" at 212.77,-187.988 h2.54
  text "*" at 225.978,-188.496 h2.54
  text "*" at 265.602,-188.496 h2.54
  text "TITLE:" at 304.58,-190.528 h2.54
  text "TOLERANCES:" at 157.906,-191.544 h2.54
  text "SEE NOTES" at 96.565,-193.548 h2.54
  text "MFG" at 212.77,-194.592 h2.54
  text "*" at 225.978,-194.592 h2.54
  text "*" at 265.602,-195.1 h2.54
  text ".X +/- 0.1" at 158.922,-196.111 h2.54
  text ".XX +/- 0.01" at 158.922,-199.159 h2.54
  text ".TitlePCB" at 311.068,-199.39 h5.59
  text ".XXX +/- 0.005" at 158.922,-202.207 h2.54
  text ".Title0" at 315.55,-209.2 h5.59
  text "THIRD ANGLE PROJECTION" at 96.184,-213.766 h2.54
  text "ALL SHEETS ARE THE" at 162.478,-217.864 h2.54
  text ".Title1" at 308.02,-218.44 h5.59
  text "SAME REVISION STATUS" at 160.129,-222.436 h2.54
  text "SIZE" at 304.718,-225.58 h2.54
  text "DRAWING NUMBER" at 314.37,-225.58 h2.54
  text "REV" at 421.442,-227.131 h3.05
  text "D" at 304.76,-233.421 h5.08
  text ".DocNumberPCB" at 314.37,-233.68 h6.6
  text ".Rev" at 421.05,-233.68 h5.08
  text "1" at 405.81,-238.76 h2.54
  text "1" at 421.05,-238.76 h2.54
  text "1:1" at 318.18,-239.014 h2.54
  text "SCALE" at 304.154,-239.189 h2.54
  text "SHEET   OF" at 390.061,-239.404 h2.54
  text "8" at 397.936,-249.936 h5.08
  text "1" at -355.555,-250.19 h5.08
  text "2" at -247.993,-251.184 h5.08
  text "4" at -31.92,-251.184 h5.08
  text "3" at -139.999,-251.343 h5.08
  text "5" at 76.079,-251.343 h5.08
  text "6" at 184.026,-251.343 h5.08
  text "7" at 292,-251.343 h5.08
PCB_SHEET2:
  lines w0.198: -378.912,281.438 -219.197,281.438 ; -378.912,286.518 -219.197,286.518 ; -345.816,281.565 -345.811,292.103 ; -313.177,281.057 -313.177,292.106 ; -231.897,275.723 -231.897,292.106 ; -404.45,-253.797 -404.45,304.806 ; -404.45,-253.797 458.983,-253.797 ; -404.45,-253.797 458.983,-253.797 ; -404.45,-253.797 -404.45,304.806 ; -404.45,304.806 458.983,304.806 ; -404.45,304.806 458.983,304.806 ; 458.983,-253.797 458.983,304.806 ; 458.983,-253.797 458.983,304.806
  lines w0.599: -398.282,-107.947 -379.232,-107.947 ; -398.282,165.102 -379.232,165.102 ; -379.232,292.101 -379.232,-241.297 ; -379.232,-222.247 -249.184,-222.247 ; -364.221,-234.947 -364.221,-222.247 ; -334.782,-241.297 -334.782,-234.947 ; -296.682,-250.822 -296.682,-241.297 ; -249.185,-241.167 -249.185,-222.628 ; -219.319,275.088 -219.319,292.103 ; -188.733,-250.822 -188.733,-241.297 ; -188.733,292.101 -188.733,301.626 ; -80.783,-250.822 -80.783,-241.297 ; -80.783,292.101 -80.783,301.626 ; 135.117,-250.822 135.117,-241.297 ; 135.117,292.101 135.117,301.626 ; 243.067,-250.822 243.067,-241.297 ; 351.016,-250.822 351.016,-241.297 ; 351.016,292.101 351.016,301.626 ; 433.566,165.102 452.616,165.102 ; 433.566,292.103 -379.245,292.103 ; 434.201,-107.947 453.251,-107.947 ; -379.245,292.103 -379.245,271.626 -379.245,292.103 ; -379.232,-241.297 433.566,-241.297 ; -379.232,-241.297 433.566,-241.297 ; -379.232,-241.297 433.566,-241.297 ; -379.232,-241.297 433.566,-241.297 ; -379.232,-234.947 -249.184,-234.947 ; -379.232,-234.947 -249.184,-234.947 ; -379.232,-234.947 -249.184,-234.947 ; -379.232,-234.947 -249.184,-234.947 ; -306.842,292.101 -306.842,301.753 ; -306.842,292.101 -306.842,301.753 ; -306.842,292.101 -306.842,301.753 ; -306.842,292.101 -306.842,301.753 ; -306.842,292.101 -306.842,301.753 ; -306.842,292.101 -306.842,301.753 ; -306.842,292.101 -306.842,301.753 ; -306.842,292.101 -306.842,301.753 ; -306.842,301.753 -219.299,301.753 ; -306.842,301.753 -224.292,301.753 -306.842,301.753 ; -306.842,301.753 -219.299,301.753 ; -294.142,292.101 -294.142,301.753 ; -294.142,292.101 -294.142,301.753 ; -294.142,292.101 -294.142,301.753 ; -294.142,292.101 -294.142,301.753 ; -219.299,301.753 -219.299,292.101 -219.299,301.753 ; 243.067,292.101 243.067,301.626 ; 243.067,292.101 243.067,301.626 ; 243.067,292.101 243.067,301.626 ; 243.067,292.101 243.067,301.626 ; 433.566,-241.297 433.566,284.278 433.566,-241.297 ; 433.566,-241.297 433.566,292.101 ; 433.566,-241.297 433.566,292.101 ; 433.566,-241.297 433.566,292.101 ; -389.392,24.64 -389.392,26.164 -384.312,26.164 -384.312,27.942 -379.232,25.402 -384.312,22.862 -384.312,24.64 -389.392,24.64 ; 24.627,-246.377 27.167,-241.297 29.707,-246.377 27.929,-246.377 27.929,-251.457 26.405,-251.457 26.405,-246.377 24.627,-246.377 ; 24.627,297.181 27.167,292.101 29.707,297.181 27.929,297.181 27.929,302.26 26.405,302.26 26.405,297.181 24.627,297.181 ; 433.566,25.402 438.646,22.862 438.646,24.64 443.726,24.64 443.726,26.164 438.646,26.164 438.646,27.942 433.566,25.402
  text "SH" at -294.97,298.663 h2.54
  text "DWG NO" at -219.818,298.248 h2.54
  text ".DocNumberPCB" at -236.469,295.408 h3.05
  text "8" at -337.905,294.92 h5.08
  text "4" at 86.453,294.92 h5.08
  text "2" at 302.526,294.92 h5.08
  text "6" at -129.493,294.76 h5.08
  text "5" at -21.546,294.76 h5.08
  text "3" at 194.532,294.76 h5.08
  text "3" at 194.532,294.76 h5.08
  text "1" at 410.254,294.76 h5.08
  text "1" at -299.969,294.392 h3.05
  text "REVISION HISTORY" at -246.121,288.013 h2.54
  text "APPROVED" at -356.357,281.946 h2.54
  text "DATE" at -325.877,281.946 h2.54
  text "DESCRIPTION" at -267.457,281.946 h2.54
  text "REV" at -221.737,281.946 h2.54
  text "SEE SHEET 1" at -234.437,276.866 h2.54
  text "A" at -385.964,231.255 h5.08
  text "A" at 452.323,231.255 h5.08
  text "B" at -385.914,91.395 h5.08
  text "B" at 452.373,91.395 h5.08
  text "C" at -386.498,-48.078 h5.08
  text "C" at 451.788,-48.078 h5.08
  text "Scale  3:1" at 269.173,-97.04 h12.7
  text "D" at -386.246,-187.777 h5.08
  text "D" at 452.041,-187.777 h5.08
  text "REV" at -366.909,-227.125 h3.05
  text ".DocNumberPCB" at -255.392,-232.404 h5.08
  text ".Rev" at -366.517,-233.674 h5.08
  text "2" at -366.517,-238.754 h2.54
  text "SHEET 2 OF" at -335.528,-239.398 h2.54
  text "8" at -343.403,-249.93 h5.08
  text "1" at 410.255,-250.184 h5.08
  text "4" at 86.453,-251.178 h5.08
  text "2" at 302.526,-251.178 h5.08
  text "7" at -237.467,-251.338 h5.08
  text "6" at -129.493,-251.338 h5.08
  text "5" at -21.546,-251.338 h5.08
  text "3" at 194.532,-251.338 h5.08
BOARD OUTLINE:
  lines w0.254: 0,0 7.462,0 7.462,1 17.5,1 17.5,0 ccw(c17.5,5) 22.5,5 22.5,15 0,15 0,0

## Panel: embedded boards
"NIR-Spec-Analog.PcbDoc" at 66.5,-84, 1 rows x 1 columns, spacing 63.5 x 38.1, rotation 0